# Altium PCB sar20-afbr-s50-adapter.PcbDoc
Units mm, origin at the board's own origin, x right, y up, seen from the top; angles counter-clockwise.
Board outline 7.4 x 13 mm, 4 copper layers (Top Layer, L2, L3, Bottom Layer), stack 0.77 mm thick; 24 components, 20 nets, 92 pads, 35 vias.
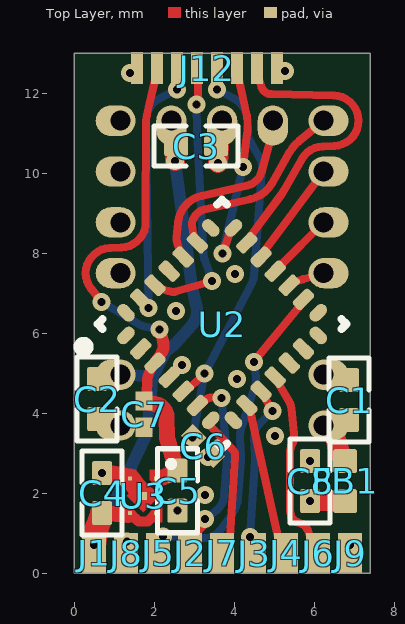
[diagram p0: Top Layer view]
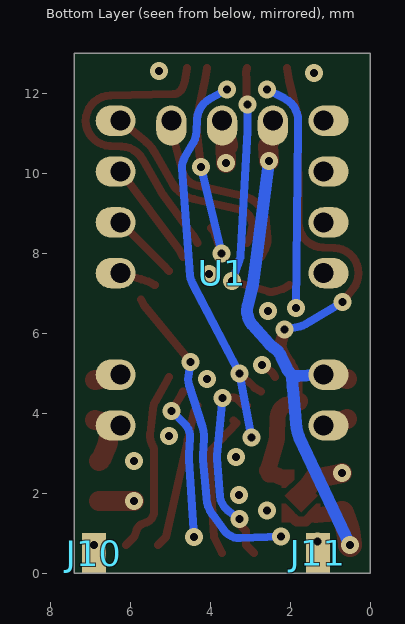
[diagram p1: Bottom Layer view, seen from below]
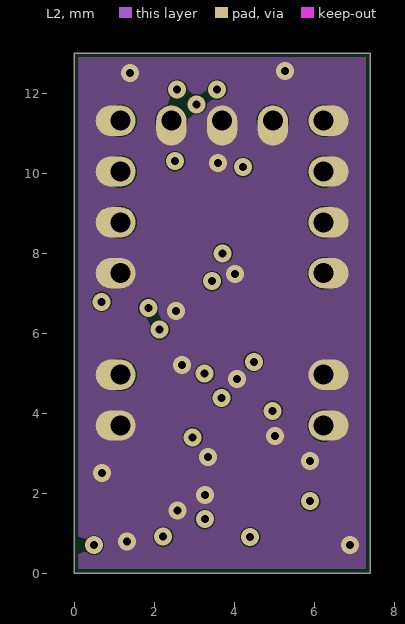
[diagram p2: L2]
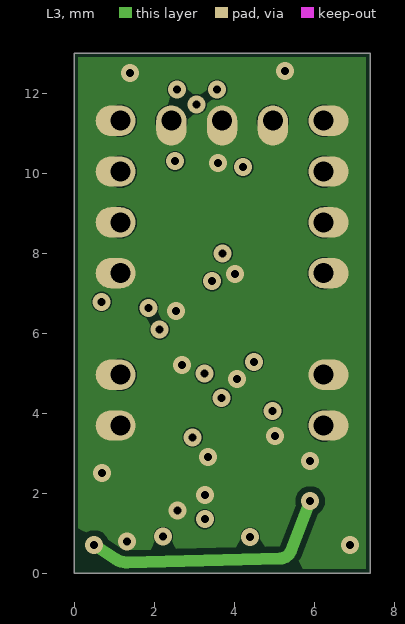
[diagram p3: L3]
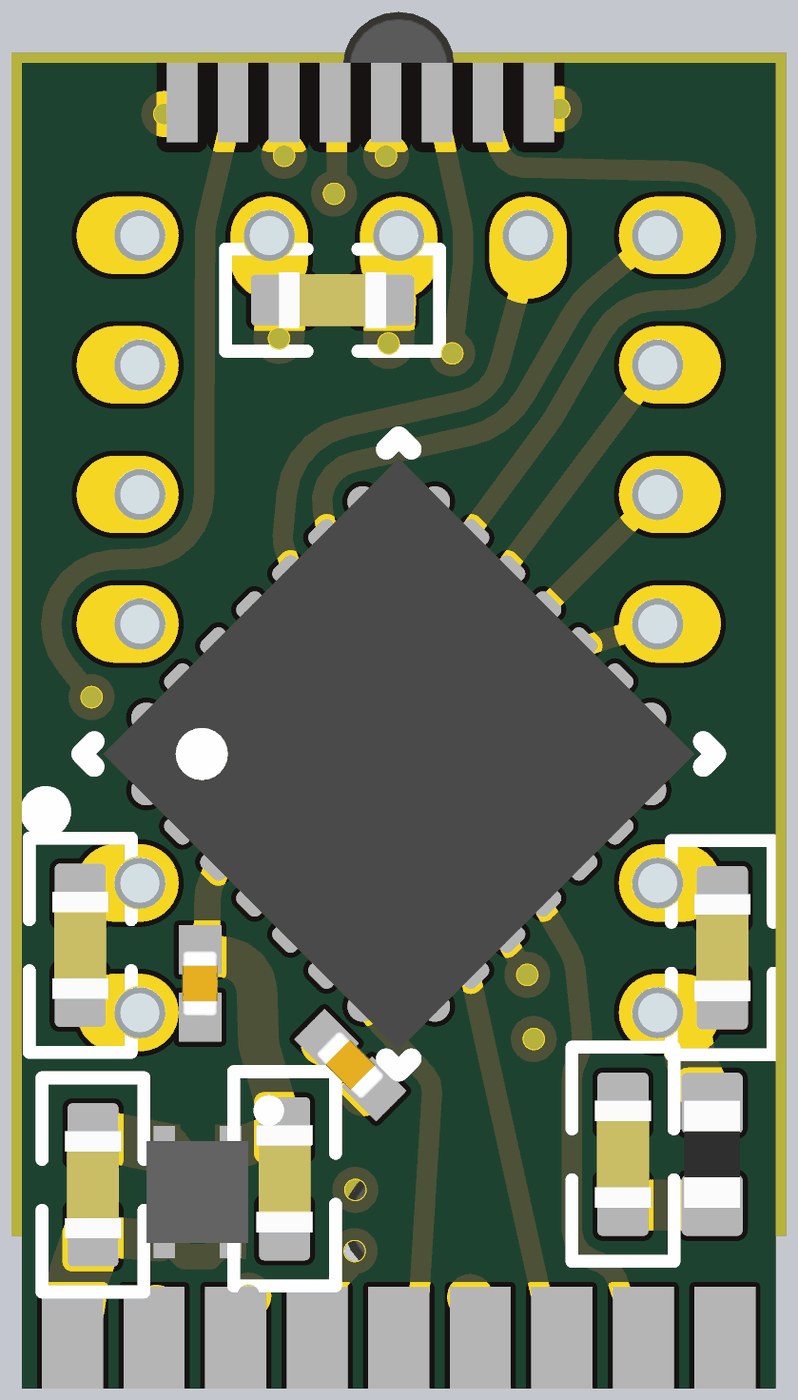
[diagram p4: 3D render of the assembled board from above, using the file's embedded part models]

## Layer stack, top to bottom
Top Solder: solder mask 0.0102, Solder Resist, Dk 3.5
Top Layer: signal copper 0.035
Dielectric 2: prepreg 0.2, PP-022, Dk 4.5
L2: signal copper 0.0175
Dielectric 1: core 0.265, Core-042, Dk 4.6
L3: signal copper 0.0175
Dielectric 3: prepreg 0.2, PP-022, Dk 4.5
Bottom Layer: signal copper 0.035
Bottom Solder: solder mask 0.0102, Solder Resist, Dk 3.5

## Board outline
0,0 7.4,0 7.4,13 0,13

## Design rules (kind name [scope] priority, off if disabled: settings)
BoardOutlineClearance [All] p1: gap=0.1 ignorepadtopadclearanceinfootprint=FALSE except(0: Arc-SplitContinuation Track-SplitContinuation SMDPad-SplitContinuation THPad-SplitContinuation Via-SplitContinuation Fill-SplitContinuation Poly-SplitContinuation Region-SplitContinuation Text-SplitContinuation)
Clearance ClearanceX2SON [HasFootprint('TI_X2SON_DQN0004A')] p1: gap=0.1 ignorepadtopadclearanceinfootprint=TRUE except(0: Arc-Hole Track-Hole SMDPad-Hole THPad-Hole Via-Hole Fill-Hole Poly-Hole Region-Hole Text-Hole)
Clearance [All] p2: gap=0.15 ignorepadtopadclearanceinfootprint=TRUE except(0: Arc-Hole Track-Hole SMDPad-Hole THPad-Hole Via-Hole Fill-Hole Poly-Hole Region-Hole Text-Hole; 0.12: SMDPad-SMDPad)
ComponentClearance [All] p1: gap=0 collisioncheckmode=3 verticalgap=0 showdistances=FALSE
PolygonConnect [All] p1: connectstyle=Direct reliefconductorwidth=0.254 reliefentries=4 polygonreliefangle="90 Angle" airgapwidth=0.254
RoomDefinition sar20-afbr-s50-adapter [InComponentClass('sar20-afbr-s50-adapter')] p1: confinementstyle=ConfineIn formatcopy=TRUE lockcomponents=FALSE outline -27.9,-23 64.2,-23 64.2,38 -27.9,38
RoutingVias [All] p1: holewidth=0.3 width=0.6 viastyle="Through Hole" minholewidth=0.2 minwidth=0.45 maxholewidth=3 maxwidth=5
SolderMaskExpansion SolderMaskExpansionVia [IsVia] p1: expansion=0.05 istentingtop=TRUE
SolderMaskExpansion [All] p2: expansion=0.05 istentingtop=FALSE
Width [All] p1: maxlimit=10 minlimit=0.2 preferedwidth=0.3
29 further rules are at their usual default settings.

## Components (designator, comment, footprint, x,y, rotation, side; value= is the part's Value field where it differs from the comment)
C1 "1u" CAPC1005X55N 6.875,4.325 r270 top
C2 "1u" CAPC1005X55N 0.575,4.35 r90 top
C3 "1u" CAPC1005X55N 3.05,10.675 r180 top
C4 "1u" CAPC1005X55N 0.7,2 r270 top
C5 "1u" CAPC1005X55N 2.58,2.06 r90 top
C6 "CAPC_100n_0201" CAPC0603X04N 3.225,3.175 r135 top value=100n
C7 "CAPC_100n_0201" CAPC0603X04N 1.75,3.975 r90 top value=100n
C8 "1u" CAPC1005X55N 5.9,2.3 r270 top
FB1 "1.5k @ 100 MHz" RESC1005X40N 6.775,2.3 r270 top
J1 "SOLDER-PAD" PAD-0610 0.5,0.5 r0 top
J2 "SOLDER-PAD" PAD-0610 2.9,0.5 r0 top
J3 "SOLDER-PAD" PAD-0610 4.5,0.5 r0 top
J4 "SOLDER-PAD" PAD-0610 5.3,0.5 r0 top
J5 "SOLDER-PAD" PAD-0610 2.1,0.5 r0 top
J6 "SOLDER-PAD" PAD-0610 6.1,0.5 r0 top
J7 "SOLDER-PAD" PAD-0610 3.7,0.5 r0 top
J8 "SOLDER-PAD" PAD-0610 1.3,0.5 r0 top
J9 "SOLDER-PAD" PAD-0610 6.9,0.5 r0 top
J10 "SOLDER-PAD" PAD-0610 6.9,0.5 r180 bottom
J11 "SOLDER-PAD" PAD-0610 1.3,0.5 r0 bottom
J12 "HIROSE-FH19C-8S-0.5SH_SIGNAL_PADS" HIROSE-FH19C-8S-0.5SH_SIGNAL_PADS 3.325,12.625 r0 top
U1 "AFBR-S50" AFBR-S50 3.7,7.5 r180 bottom locked
U2 "STM32G071GxU" QFN50P400X400X60-28N 3.7,6.225 r45 top
U3 "TPS7A20_DQN" TI_X2SON_DQN0004A 1.725,1.93 r270 top

## Footprints (in the part's own frame and the unit in brackets; to place one, negate y for a bottom-side part, rotate by r counter-clockwise, add the part's x,y. Pads: shape width x height; smd on the part's side, far side on the other; paste and mask are expansions set on the pad)
AFBR-S50 [mm] "AFBR-S50"
  oval 1x0.76 hole 0.5 copper offset -0.12,0: 1(-2.54,3.81) 2(-2.54,2.54) 3(-2.54,1.27) 4(-2.54,0) 5(-2.54,-2.54) 6(-2.54,-3.81)
  oval 1x0.76 hole 0.5 copper offset 0.12,0: 7(2.54,-3.81) 8(2.54,-2.54) 9(2.54,0) 10(2.54,1.27) 11(2.54,2.54) 12(2.54,3.81)
  oval 0.76x1 hole 0.5 copper offset 0,-0.12: 13(1.27,3.81) 14(0,3.81) 15(-1.27,3.81)
  body extent -6.96,-8.07 6.96,7.67, height 19.84
CAPC0603X04N [mm] "Chip Capacitor, 2-Leads, Body 0,60x0,30mm, IPC Medium Density"
  rect 0.48x0.42 smd: 1(-0.33,0) 2(0.33,0)
  body extent -0.33,-0.18 0.33,0.18, height 0.35
CAPC1005X55N [mm] "Chip Capacitor, Body 1.0x0.5mm, EIA 0402, IPC Medium Density"
  round 0.2 on Mech15: 0(0,0)
  rrect20% 0.6x0.5 smd: 1(-0.5,0) 2(0.5,0)
  Top Layer pour cut-out: -0.325,0.375 -0.2,0.5 0.2,0.5 0.325,0.375 0.325,-0.375 0.2,-0.5 -0.2,-0.5 -0.325,-0.375
  silkscreen extent -1.05,-0.5 1.05,0.5, body extent -0.52,-0.27 0.53,0.28, height 0.55
HIROSE-FH19C-8S-0.5SH_SIGNAL_PADS [mm]
  rect 0.3x0.8 smd paste+0 mask+0.102: 1(-1.75,0) 2(-1.25,0) 3(-0.75,0) 4(-0.25,0) 5(0.25,0) 6(0.75,0) 7(1.25,0) 8(1.75,0)
PAD-0610 [mm]
  rect 0.6x1 smd: 1(0,0)
QFN50P400X400X60-28N [mm] "QFN, 28-Leads, Body 4,00x4,00mm, Pitch 0,50mm, IPC Medium Density"
  oval 0.5x0.3 smd: 1(-1.9,1.5) 7(-1.9,-1.5) 15(1.9,-1.5) 21(1.9,1.5)
  rrect50% 0.55x0.3 smd: 2(-1.875,1) 3(-1.875,0.5) 4(-1.875,0) 5(-1.875,-0.5) 6(-1.875,-1) 16(1.875,-1) 17(1.875,-0.5) 18(1.875,0) 19(1.875,0.5) 20(1.875,1)
  oval 0.3x0.5 smd: 8(-1.5,-1.9) 14(1.5,-1.9) 22(1.5,1.9) 28(-1.5,1.9)
  rrect50% 0.3x0.55 smd: 9(-1,-1.875) 10(-0.5,-1.875) 11(0,-1.875) 12(0.5,-1.875) 13(1,-1.875) 23(1,1.875) 24(0.5,1.875) 25(0,1.875) 26(-0.5,1.875) 27(-1,1.875)
  silkscreen extent -2.97,-2.2 2.2,2.2, body extent -2.05,-2.05 2.05,2.05, height 0.6
RESC1005X40N [mm] "Chip Resistor, Body 1.0x0.5mm, EIA 0402, IPC Medium Density"
  round 0.2 on Mech15: 0(0,0)
  rrect20% 0.6x0.6 smd: 1(-0.5,0) 2(0.5,0)
  Top Layer pour cut-out: -0.325,0.375 -0.2,0.5 0.2,0.5 0.325,0.375 0.325,-0.375 0.2,-0.5 -0.2,-0.5 -0.325,-0.375
  body extent -0.52,-0.27 0.53,0.28, height 0.4
TI_X2SON_DQN0004A [mm]
  rect 0.1x0.1 smd paste+0 mask+0: 1(-0.43,0.325) 2(-0.43,-0.325) 3(0.43,-0.325) 4(0.43,0.325)
  rect 0.2x0.2 smd paste+0 mask+0: 5(0,0)
  Top Layer region: 0,0.41 -0.41,0 0,-0.41 0.41,0
  Top Layer region: 0.66,0.48 0.2,0.48 0.2,0.38 0.41,0.17 0.66,0.17
  Top Layer region: -0.66,-0.48 -0.2,-0.48 -0.2,-0.38 -0.41,-0.17 -0.66,-0.17
  Top Layer region: 0.66,-0.48 0.2,-0.48 0.2,-0.38 0.41,-0.17 0.66,-0.17
  Top Layer region: -0.66,0.48 -0.2,0.48 -0.2,0.38 -0.41,0.17 -0.66,0.17
  silkscreen extent -0.85,0.65 -0.75,0.75, body extent -0.5,-0.5 0.5,0.5, height 0.34

## Part data
C1 C2 C3 C4 C5 C8: library part CAPC_100n_0402_X5R_16V_10%, "Capacitor SMD Cer 100nF 10% 16V X5R 0402", Manufacturer 1="AVX Corporation", Manufacturer 2=Yageo, Manufacturer Part Number 1=0402YD104KAT2A, Manufacturer Part Number 2=CC0402KRX5R7BB104, Operating Temperature="-55°C ~ 125°C", Package / Case="0402 (1005 Metric)", Ratings="16V; X5R", Supplier Part Number 1=478-1126-1-ND, Tolerance=±10%, ComponentLink1Description=http://www.avx.com/docs/Catalogs/cx5r.pdf, ComponentLink1URL=http://www.avx.com/docs/Catalogs/cx5r.pdf, ComponentLink2Description=http://www.yageo.com/documents/recent/UPY-GPHC_X5R_4V-to-50V_12.pdf, ComponentLink2URL=http://www.yageo.com/documents/recent/UPY-GPHC_X5R_4V-to-50V_12.pdf, SCDType=spec, Size / Dimension="0.039\" L x 0.020\" W (1.00mm x 0.50mm)", Supplier 1=Digi-Key, Supplier 2=Digi-Key, Supplier Part Number 2=311-1347-1-ND
FB1: library part FERRITE_BEAD

## Via types
v1: diameter 0.45, hole 0.2, Top Layer to Bottom Layer, tented both sides, 35 vias

## Nets (pads, with @x,y where several pads share a name; then routed paths per layer and width w, separated by ;. In a path a pad name is that pad's centre, name@x,y a point inside that pad or via, vN(x,y) a via of type N, cw(c..) or ccw(c..) an arc to the next point about the centre after c; other vN are vias at no path point)
+3.3: C5.2 C7.2 J12.2 U2.3 U3.1 | length 13.1
  Top Layer w0.2: v1(0.686,6.782) 0.427,7.108 cw(c0.92,7.5) 0.29,7.5 cw(c0.92,7.5) 0.896,8.13 1.184,8.14 ccw(c1.16,8.77) 1.79,8.768 1.8,11.312 cw(c2.43,11.31) 1.817,11.457 2.025,12.325 J12.2
  Top Layer w0.26: C7.2 1.817,4.415 1.817,4.485 cw(c2.077,4.484) 1.817,4.49 1.825,4.819 cw(c2.18,4.811) 1.853,4.95 1.932,5.136 U2.3
  Top Layer w0.3: U2.3 2.029,5.261 ccw(c1.817,5.473) 2.075,5.32 2.183,5.502 ccw(c1.862,5.695) 2.223,5.796 v1(2.14,6.088)
  Top Layer w0.4: C7.2 1.76,4.265 1.964,4.238 ; 1.965,4.238 2.005,4.232 cw(c1.96,3.885) 2.31,3.897 2.324,3.42 ccw(c2.673,3.43) 2.337,3.334 2.339,3.328 2.523,2.679 ccw(c2.908,2.789) C5.2@2.53,2.658 ; 2.205,2.385 2.296,2.428 cw(c2.466,2.065) 2.466,2.465 2.53,2.465 C5.2 C5.2@2.53,2.658
  Bottom Layer w0.2: v1(0.686,6.782) 1.526,6.275 1.609,6.225 ccw(c1.854,6.632) 1.759,6.167 v1(2.14,6.088)
+5: C2.2 C3.2 C4.2 C8.2 FB1.2 J1.1 U1.8 U1.13 U3.3 U3.4 | length 22.7
  Top Layer w0.25: U3.3@1.35,1.45 U3.3 1.605,1.295 1.845,1.295 U3.4
  Top Layer w0.4: C4.2 U3.3@1.35,1.45 ; U1.13 2.49,11.25 2.49,10.725 C3.2
  Top Layer w0.5: C2.2 U1.8 ; v1(2.525,10.3) C3.2 ; v1(5.9,1.8) FB1.2
  Top Layer w0.6: v1(0.5,0.7) 0.555,1.067 cw(c1,1) 0.576,1.151 C4.2
  L3 w0.3: v1(0.5,0.7) 1.036,0.354 ccw(c1.321,0.794) 1.231,0.277 1.233,0.277 ccw(c1.321,0.794) 1.334,0.27 5.147,0.367 ccw(c5.139,0.666) 5.419,0.558 v1@5.9,1.799
  Bottom Layer w0.3: v1(0.5,0.7) 1.775,3.4 ccw(c1.16,3.69) 1.837,3.625 1.933,4.611 ccw(c1.634,4.64) 1.934,4.618 1.936,4.654 1.957,4.933 ; U1.8 1.791,4.934 ccw(c1.804,5.233) 1.804,4.933 1.957,4.933 ; U1.13@2.43,11.07 U1.13@2.43,11.27 ; v1(2.525,10.3) 2.842,7.881 ccw(c3.71,7.994) 2.842,7.879 2.93,7.23 ccw(c3.45,7.3) 2.939,7.179 3.06,6.674 cw(c2.55,6.55) 2.943,6.202 2.533,5.74 cw(c2.14,6.088) 2.42,5.644 ccw(c2.7,5.2) 2.225,5.424 2.075,5.105 cw(c1.804,5.233) 2.047,5.057 1.957,4.933
CSn1: U1.15 U2.24 | length 4.9
  Top Layer w0.2: U2.24 2.639,8.063 2.579,8.242 cw(c2.887,8.346) 2.563,8.376 2.6,8.769 cw(c3.346,8.7) 3.182,9.432 4.329,9.689 ccw(c4.225,10.152) 4.683,10.028 4.963,11.044 4.97,11.07 U1.15
CSn2: J5.1 U2.16 | length 7.9
  Top Layer w0.2: v1(4.491,5.282) 5.632,6.669 ccw(c5.478,6.796) U2.16@5.651,6.697 ; U2.16@5.652,6.698 U2.16
  Bottom Layer w0.2: v1(2.225,0.914) 3.25,0.876 ccw(c3.267,1.351) 3.65,1.069 3.939,1.462 ccw(c3.274,1.951) 4.097,1.884 4.174,2.832 ccw(c3.352,2.898) 4.175,2.947 4.151,3.351 cw(c4.975,3.4) 4.189,3.652 4.527,4.705 ccw(c4.075,4.85) 4.545,4.92 v1(4.491,5.282)
DEBUG_RX: J12.3 U2.27 | length 5.9
  Bottom Layer w0.2: v1(1.854,6.632) 1.8,11.062 cw(c2.43,11.07) 1.8,11.07 1.8,11.31 cw(c2.43,11.31) 2.145,11.872 v1(2.575,12.09)
DEBUG_TX: J12.4 U2.26 | length 6.9
  Top Layer w0.2: U2.26 2.18,7.109 2.359,7.048 ccw(c2.463,7.356) 2.552,7.044 v1(3.45,7.3) ; v1(3.065,11.718) v1@3.088,11.824 ; J12.4@3.075,12.624 cw(c2.898,12.532) J12.4@3.098,12.528 ; v1@3.089,11.825 ccw(c2.893,11.866) 3.093,11.866 3.093,12.325 J12.4@3.098,12.528
  Bottom Layer w0.2: v1(3.065,11.718) 3.07,11.065 ccw(c3.7,11.07) 3.071,11.036 3.226,8.137 3.235,7.969 ; 3.236,7.968 ccw(c3.71,7.994) 3.236,7.958 ccw(c3.71,7.994) 3.262,7.837 v1(3.45,7.3)
GND: C1.1 C2.1 C3.1 C4.1 C5.1 C6.1 C7.1 C8.1 J8.1 J9.1 J10.1 J11.1 J12.1 J12.8 U1.5 U1.7 U1.9 U1.14 U2.4 U3.2 U3.5 | length 4.7
  Top Layer w0.2: U2.4 2.422,4.986 cw(c2.597,4.888) 2.455,5.029 cw(c2.597,4.888) 2.494,5.06 v1@2.584,5.113 ; v1@2.585,5.113 ccw(c2.481,5.284) 2.602,5.125 v1(2.7,5.2)
  Top Layer w0.3: C3.1@3.623,10.723 3.7,10.775 3.7,11.07 U1.14
  Top Layer w0.5: C2.1 U1.7 ; v1(0.7,2.5) U3.2 1.626,2.05 ccw(c2.05,2.36) 1.647,2.024 U3.5 ; C3.1 U1.14 ; v1(3.6,10.25) C3.1@3.62,10.672 ; U1.5 C1.1
  other v1: 6.9,0.7 1.321,0.794 2.58,1.56 3.274,1.951 5.9,2.8 3.352,2.898 5.025,3.43 4.075,4.85 2.55,6.55 4.025,7.475 1.4,12.5 5.275,12.55
GPIO1: J6.1 U2.11 | length 4.6
  Top Layer w0.2: U2.11 5.114,4.74 5.372,4.298 cw(c4.961,4.059) 5.434,4.107 5.497,3.478 cw(c5.025,3.43) 5.438,3.197 ccw(c5.7,3.05) 5.4,3.05 5.4,1.55 ccw(c5.7,1.55) 5.594,1.269 5.688,1.234 cw(c5.6,1) 5.836,1.083 5.9,0.9 J6.1@6.1,0.7
GPIO2: J7.1 U2.7 | length 3.7
  Top Layer w0.2: U2.7 3.346,3.75 3.96,3.091 cw(c3.777,2.92) 4.026,2.905 3.9,0.9 J7.1
IRQn: U1.4 U2.17 | length 0.9
  Top Layer w0.2: U2.17 5.538,7.286 5.717,7.346 cw(c5.821,7.038) 5.73,7.35 U1.4
MISO1: U1.3 U2.18 | length 1.7
  Top Layer w0.2: U2.18 5.147,7.677 U1.3
MISO2: J4.1 U2.9 | length 3.7
  Top Layer w0.2: U2.9 4.407,4.033 4.561,3.329 ccw(c5.025,3.43) 4.561,3.328 5.1,0.9 J4.1@5.3,0.7
MOSI1: U1.2 U2.19 | length 2.7
  Top Layer w0.2: U2.19 4.761,8.063 U1.2
MOSI2: J3.1 U2.10 | length 3.9
  Top Layer w0.2: U2.10 4.742,4.42 ccw(c4.916,4.518) 4.745,4.415 v1(4.961,4.059)
  Bottom Layer w0.2: v1(4.4,0.9) 4.524,2.823 ccw(c3.352,2.898) 4.525,2.967 4.501,3.373 cw(c4.975,3.4) 4.638,3.735 v1(4.961,4.059)
NetC1_2: C1.2 FB1.1 U1.6 | length 1.7
  Top Layer w0.5: U1.6 6.508,3.747 C1.2 ; U1.6@6.41,3.69 6.48,3.69 6.558,3.266 ccw(c7.05,3.357) 6.591,3.157 6.725,2.85 FB1.1
nRST: C6.2 J12.5 U2.5 | length 10.3
  Top Layer w0.2: U2.5 2.887,4.634 v1(3.262,4.989) 3.256,4.995 cw(c3.398,5.136) v1@3.212,5.063
  Bottom Layer w0.2: v1(2.962,3.393) v1(3.262,4.989) 3.274,5.014 cw(c3.453,4.926) 3.276,5.018 4.446,7.255 ccw(c4.025,7.475) 4.499,7.44 4.699,10.117 ccw(c4.225,10.152) 4.635,10.392 4.425,10.754 cw(c4.97,11.07) 4.34,11.046 4.33,11.334 ccw(c3.7,11.31) 3.996,11.866 v1(3.575,12.09)
SCK1: U1.1 U2.23 | length 4.9
  Top Layer w0.2: U2.23 2.993,8.417 2.953,8.625 cw(c3.346,8.7) 3.26,9.09 4.406,9.347 ccw(c4.225,10.152) 4.942,9.744 5.389,10.527 cw(c6.24,10.04) 5.617,10.796 U1.1
SCK2: J2.1 U2.6 | length 4.9
  Top Layer w0.2: J2.1 3.1,0.7 3.1,1.054 3.213,1.167 ccw(c3.072,1.309) v1(3.267,1.351) ; U2.6 3.152,4.192 3.29,4.33 cw(c3.432,4.189) 3.438,4.389 v1(3.686,4.381)
  Bottom Layer w0.2: v1(3.267,1.351) 3.56,1.571 ccw(c3.274,1.951) 3.748,1.912 3.825,2.86 ccw(c3.352,2.898) 3.824,2.944 v1(3.686,4.381)
SWCLK: J12.6 U2.21 | length 5.4
  Top Layer w0.2: v1(3.71,7.994) 3.864,8.423 ccw(c3.488,8.558) 3.865,8.425 3.912,8.558 U2.21 ; J12.6 4.125,12.325 4.316,11.443 cw(c3.7,11.31) 4.33,11.31 4.33,11.07 cw(c3.7,11.07) 4.326,10.995 v1(4.225,10.152)
  Bottom Layer w0.2: v1(3.71,7.994) v1(4.225,10.152)
SWDIO: J12.7 U2.20 | length 9
  Top Layer w0.2: U2.20 U2.20@4.407,8.417 ; J12.7 4.625,12.325 4.689,12.142 ccw(c4.925,12.225) 4.919,11.975 6.494,11.94 cw(c6.48,11.31) 6.504,10.68 6.216,10.67 ccw(c6.24,10.04) 5.693,10.353 5.245,9.569 cw(c4.225,10.152) 5.172,9.456 U2.20@4.407,8.417 ; 5.119,9.385 U2.20@4.407,8.417
pads on no net: C1.0 C2.0 C3.0 C4.0 C5.0 C8.0 FB1.0 U1.10 U1.11 U1.12 U2.1 U2.2 U2.8 U2.12 U2.13 U2.14 U2.15 U2.22 U2.25 U2.28

## Polygon pours and split planes (outlines as drawn)
GND on L2 "GND_L02_P000" (solid, remove dead copper, pour order 0): 0,0 0,13 7.4,13 7.4,0
GND on L3 "GND_L03_P001" (solid, remove dead copper, pour order 1): 0,0 7.4,0 7.4,13 0,13